# Altium PCB LED.PcbDoc
Units mil, origin at the board's own origin, x right, y up, seen from the top; angles counter-clockwise.
Board outline 694.31 x 694.31 mil, 2 copper layers (Top Layer, Bottom Layer); 2 components, 3 nets, 8 pads, 0 vias.
Unrouted connection lines stored in the file: 1.
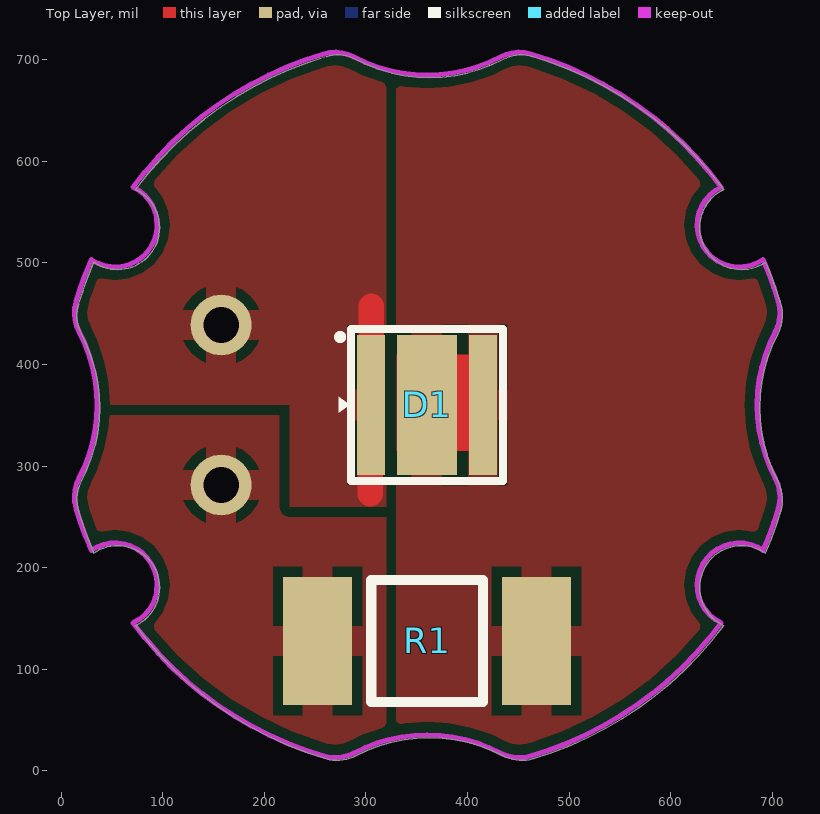
[diagram p0: Top Layer view]
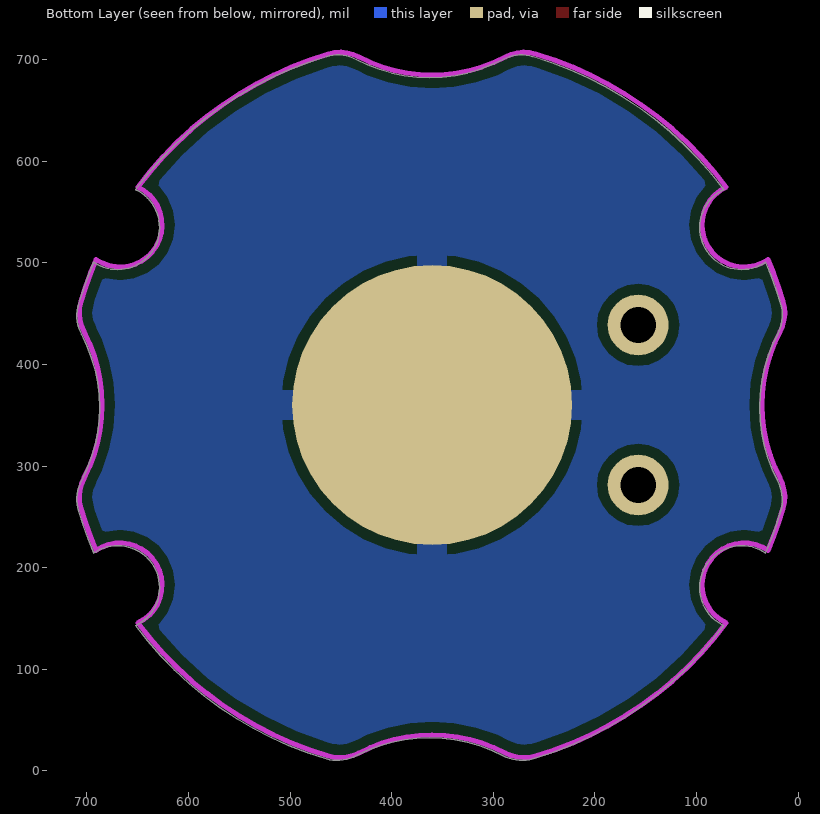
[diagram p1: Bottom Layer view, seen from below]

## Layer stack, top to bottom
Top Solder: solder mask 0.4, Solder Resist, Dk 3.5
Top Layer: signal copper 1.4
Dielectric 1: dielectric 12.6, FR-4, Dk 4.8
Bottom Layer: signal copper 1.4
Bottom Solder: solder mask 0.4, Solder Resist, Dk 3.5

## Board outline
17.09,255.89 ccw(c362.65,357.65) 32.08,214.51 cw(c55.57,180.49) 73.26,143.13 ccw(c362.65,357.65) 260.89,12.09 ccw(c272.01,49.86) 290.32,15 cw(c362.65,-122.66) 434.99,15 ccw(c453.3,49.86) 464.42,12.09 ccw(c362.65,357.65) 652.05,143.13 cw(c669.74,180.49) 693.23,214.51 ccw(c362.65,357.65) 708.22,255.89 ccw(c670.45,267.01) 705.3,285.32 cw(c842.97,357.65) 705.3,429.99 ccw(c670.45,448.3) 708.22,459.42 ccw(c362.65,357.65) 693.23,500.8 cw(c669.74,534.82) 652.05,572.18 ccw(c362.65,357.65) 464.42,703.22 ccw(c453.3,665.45) 434.99,700.3 cw(c362.65,837.97) 290.32,700.3 ccw(c272.01,665.45) 260.89,703.22 ccw(c362.65,357.65) 73.26,572.18 cw(c55.57,534.82) 32.08,500.8 ccw(c362.65,357.65) 17.09,459.42 ccw(c54.86,448.3) 20,429.99 cw(c-117.66,357.65) 20,285.32 ccw(c54.86,267.01)

## Design rules (kind name [scope] priority, off if disabled: settings)
Clearance [All] p1: gap=10 ignorepadtopadclearanceinfootprint=FALSE except(0: Arc-Hole Track-Hole SMDPad-Hole THPad-Hole Via-Hole Fill-Hole Poly-Hole Region-Hole Text-Hole)
PolygonConnect [All] p1: connectstyle=Relief reliefconductorwidth=30 reliefentries=4 polygonreliefangle="90 Angle" airgapwidth=10
RoutingVias [All] p1: holewidth=28 width=50 viastyle="Through Hole" minholewidth=28 minwidth=50 maxholewidth=28 maxwidth=50
SolderMaskExpansion [All] p1: expansion=4 istentingtop=FALSE
Width [All] p1: maxlimit=40 minlimit=10 preferedwidth=10 minimp=50.000000 maximp=50.000000 favimp=50.000000
30 further rules are at their usual default settings.

## Components (designator, comment, footprint, x,y, rotation, side; value= is the part's Value field where it differs from the comment)
D1 "XPGDRY-L1-0000-00501" LED1414 360.24,360.24 r90 top (schematic designator D2)
R1 "4R3 1% 2512" R2512[6432] 360.24,127.95 r180 top value=4R3 (schematic designator R5)

## Footprints (in the part's own frame and the unit in brackets; to place one, negate y for a bottom-side part, rotate by r counter-clockwise, add the part's x,y. Pads: shape width x height; smd on the part's side, far side on the other; paste and mask are expansions set on the pad)
LED1414 [mm]
  rect 3.5x0.7 smd: A(0,1.4) C(0,-1.4)
  rect 3.5x1.5 smd mask+0.1: C(0,0)
  silkscreen extent -1.9,-1.9 1.9,2.22, body extent -1.92,-1.92 1.93,1.93, height 2.4
R2512[6432] [mm] "Chip Resistor, Body 6.35x3.18mm"
  rect 1.725x3.2 smd: 1(-2.737,0) 2(2.737,0)
  silkscreen extent -1.4,-1.52 1.4,1.52, body extent -3.2,-1.6 3.2,1.6, height 0.6

## Part data
D1: "LED XP-G3 448NM ROYAL BLUE SMD 1414 (3535 Metric)", Manufacturer=Cree, Mounting Technology="Surface Mount", PackageDescription="1414 (3535 Metric)", PackageReference=1414, PartNumber=XPGDRY-L1-0000-00501
R1: library part RES_4R3_2512_1%, "4R3 1.5W 1% 2512 (6432 Metric)", Manufacturer=Vishay, PartNumber=CRCW25123R90JNEG, Power=1.5W, Tolerance=1%, ComponentLink1Description=Datasheet, ComponentLink1URL=http://www.vishay.com/docs/20043/crcwhpe3.pdf, Mounting Technology="Surface Mount", PackageDescription="2512 (6432 Metric)", PackageReference=2512

## Free pads (board coordinates)
  round 60 hole 35: 6(157.48,281.5) 7(157.48,438.98)
  round 275.59 smd far side: 8(360.24,360.24)

## Nets (pads, with @x,y where several pads share a name; then routed paths per layer and width w, separated by ;. In a path a pad name is that pad's centre, name@x,y a point inside that pad or via, vN(x,y) a via of type N, cw(c..) or ccw(c..) an arc to the next point about the centre after c; other vN are vias at no path point)
LED-: pad.6 R1.2
Net: D1.C pad.8 R1.1
VBB: D1.A pad.7 | length 185.4
  Top Layer w25: 304.13,272.64 304.13,359.25 D1.A 305.12,457.68

## Polygon pours and split planes (outlines as drawn)
LED- on Top Layer (solid, remove dead copper, pour order 2): 0,360.24 225,360.24 225,260 330,260 330,0 0,0
VBB on Top Layer (solid, remove dead copper, pour order 1): 0,360.24 225,360.24 225,260 330,260 330,720 320,710 0,710
Net on Top Layer (solid, remove dead copper, pour order 0): 330,0 835,0 840,5 835,10 835,785 335,785 330,790
Net on Bottom Layer (solid, remove dead copper, pour order 3): 0,0 751.97,0 744.09,7.87 744.09,753.94 21.65,753.94 0,732.28

## Keep-outs
Keep-Out Layer:
  lines w5: 14.67,258.47 cw(c52.44,269.59) 17.59,287.9 ccw(c-120.08,360.24) 17.59,432.57 cw(c52.44,450.88) 14.67,462 cw(c360.24,360.24) 29.66,503.38 ccw(c53.15,537.4) 70.84,574.76 cw(c360.24,360.24) 258.47,705.8 cw(c269.59,668.03) 287.9,702.88 ccw(c360.24,840.55) 432.57,702.88 cw(c450.88,668.03) 462,705.8 cw(c360.24,360.24) 649.63,574.76 ccw(c667.32,537.4) 690.81,503.38 cw(c360.24,360.24) 705.8,462 cw(c668.03,450.88) 702.88,432.57 ccw(c840.55,360.24) 702.88,287.9 cw(c668.03,269.59) 705.8,258.47 cw(c360.24,360.24) 690.81,217.09 ccw(c667.32,183.07) 649.63,145.71 cw(c360.24,360.24) 462,14.67 cw(c450.88,52.44) 432.57,17.59 ccw(c360.24,-120.08) 287.9,17.59 cw(c269.59,52.44) 258.47,14.67 cw(c360.24,360.24) 70.84,145.71 ccw(c53.15,183.07) 29.66,217.09 cw(c360.24,360.24) 14.67,258.47

## Other copper
Top Layer:
  rectangle net Net: 330,315 415.35,410